# Altium PCB DXv2.pcbdoc (part 1 of 3)
Units mil, origin at the board's own origin, x right, y up, seen from the top; angles counter-clockwise.
Board outline 12846.15 x 9153.85 mil, 2 copper layers (TopLayer, BottomLayer); 114 components, 102 nets, 394 pads, 175 vias.
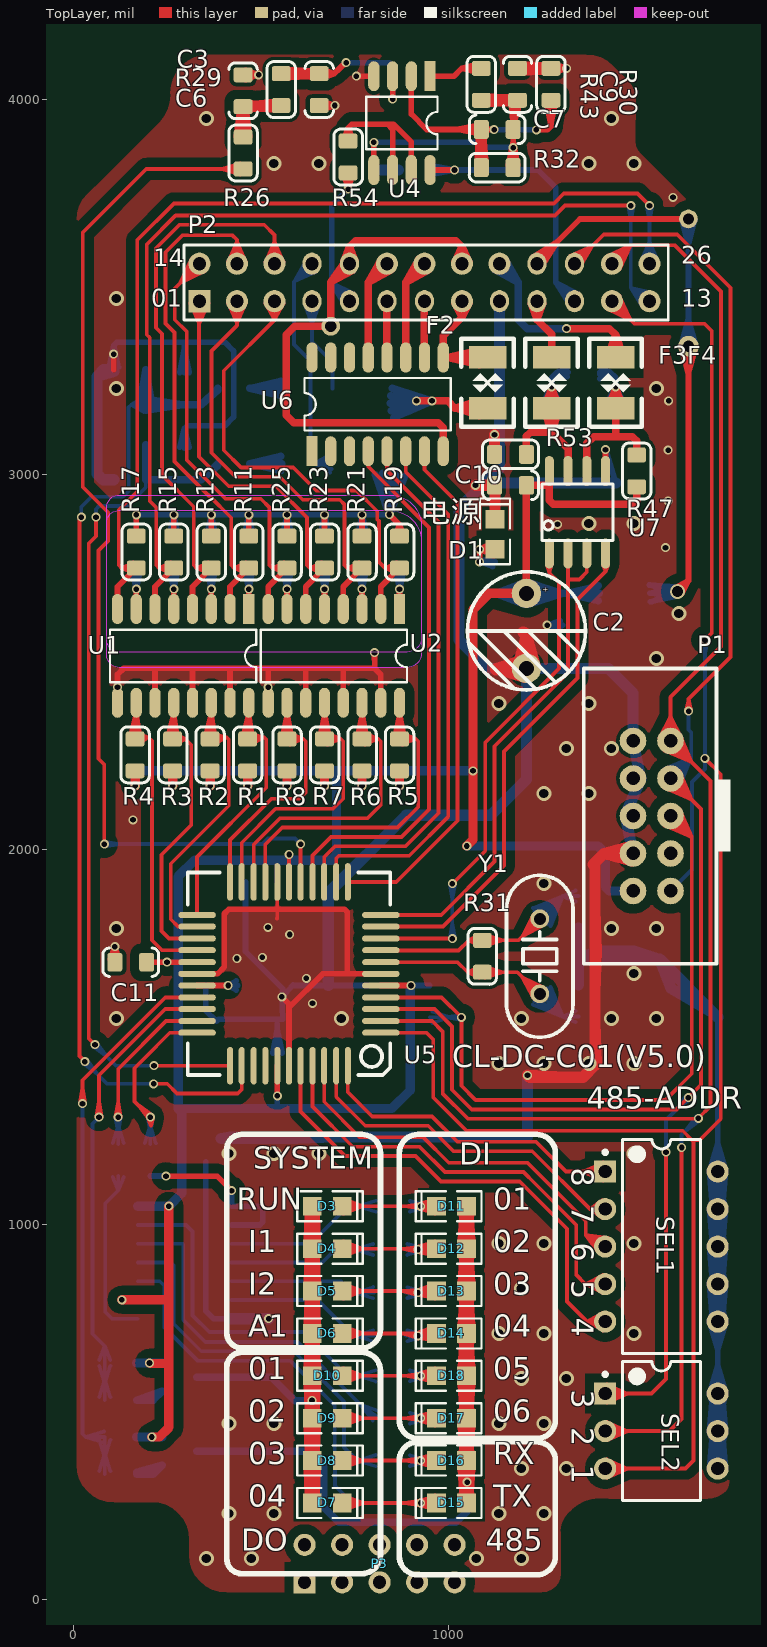
[diagram p0: TopLayer view]
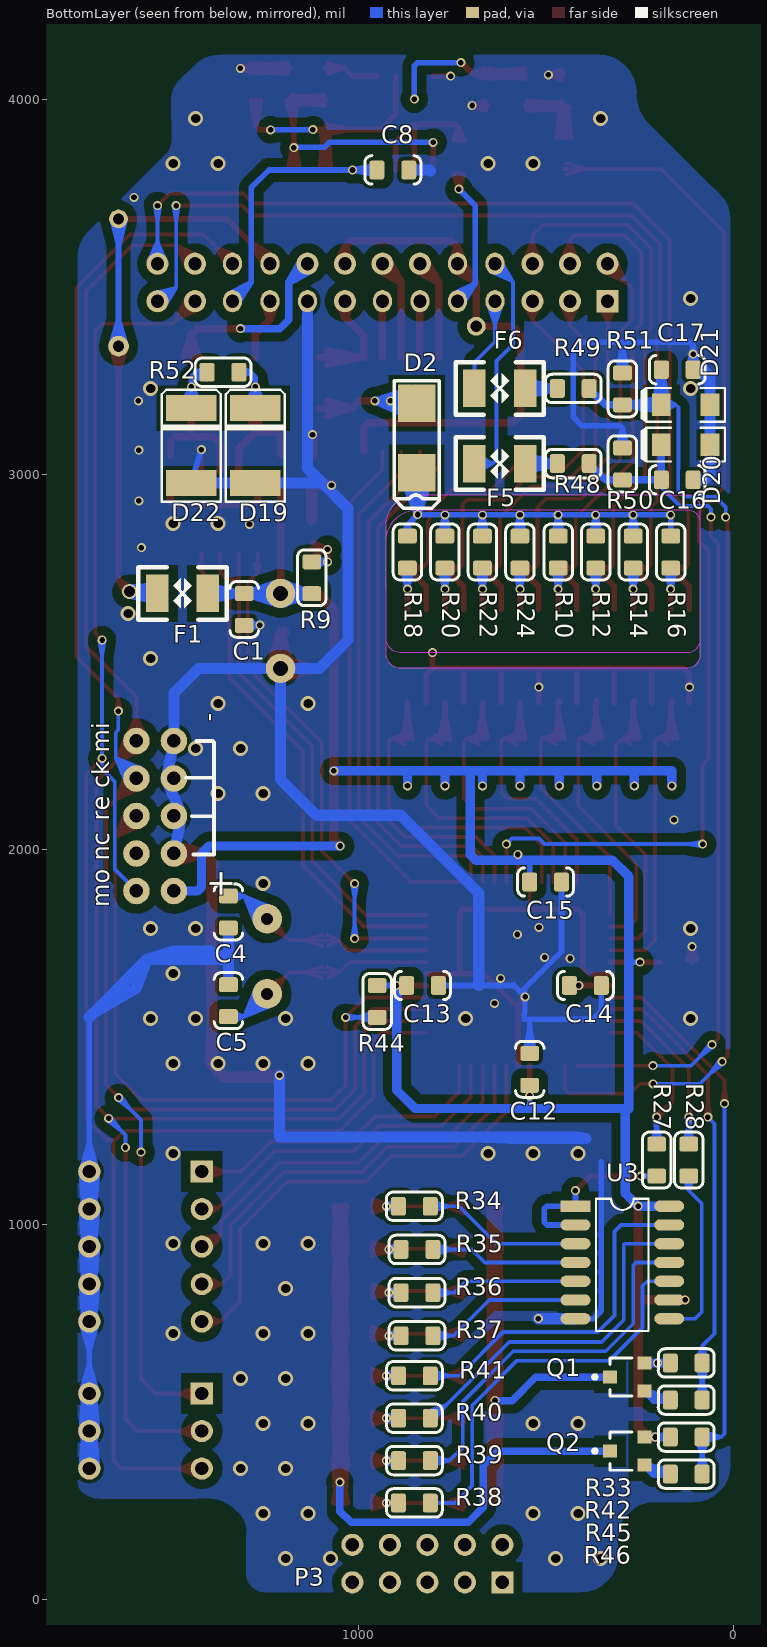
[diagram p1: BottomLayer view, seen from below]
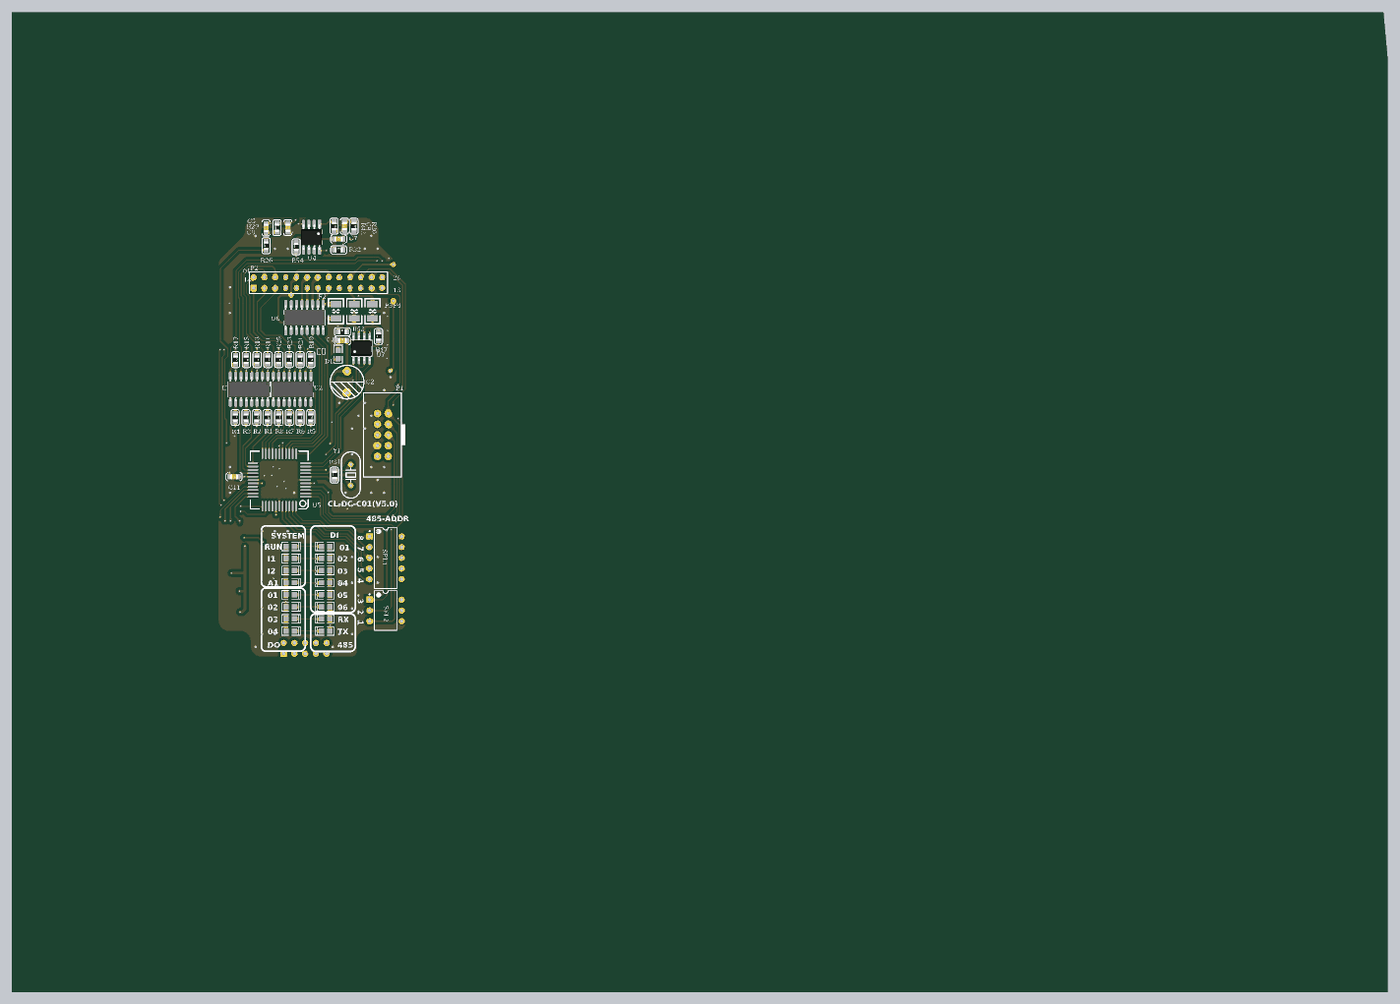
[diagram p4: 3D render of the assembled board from above, using the file's embedded part models]
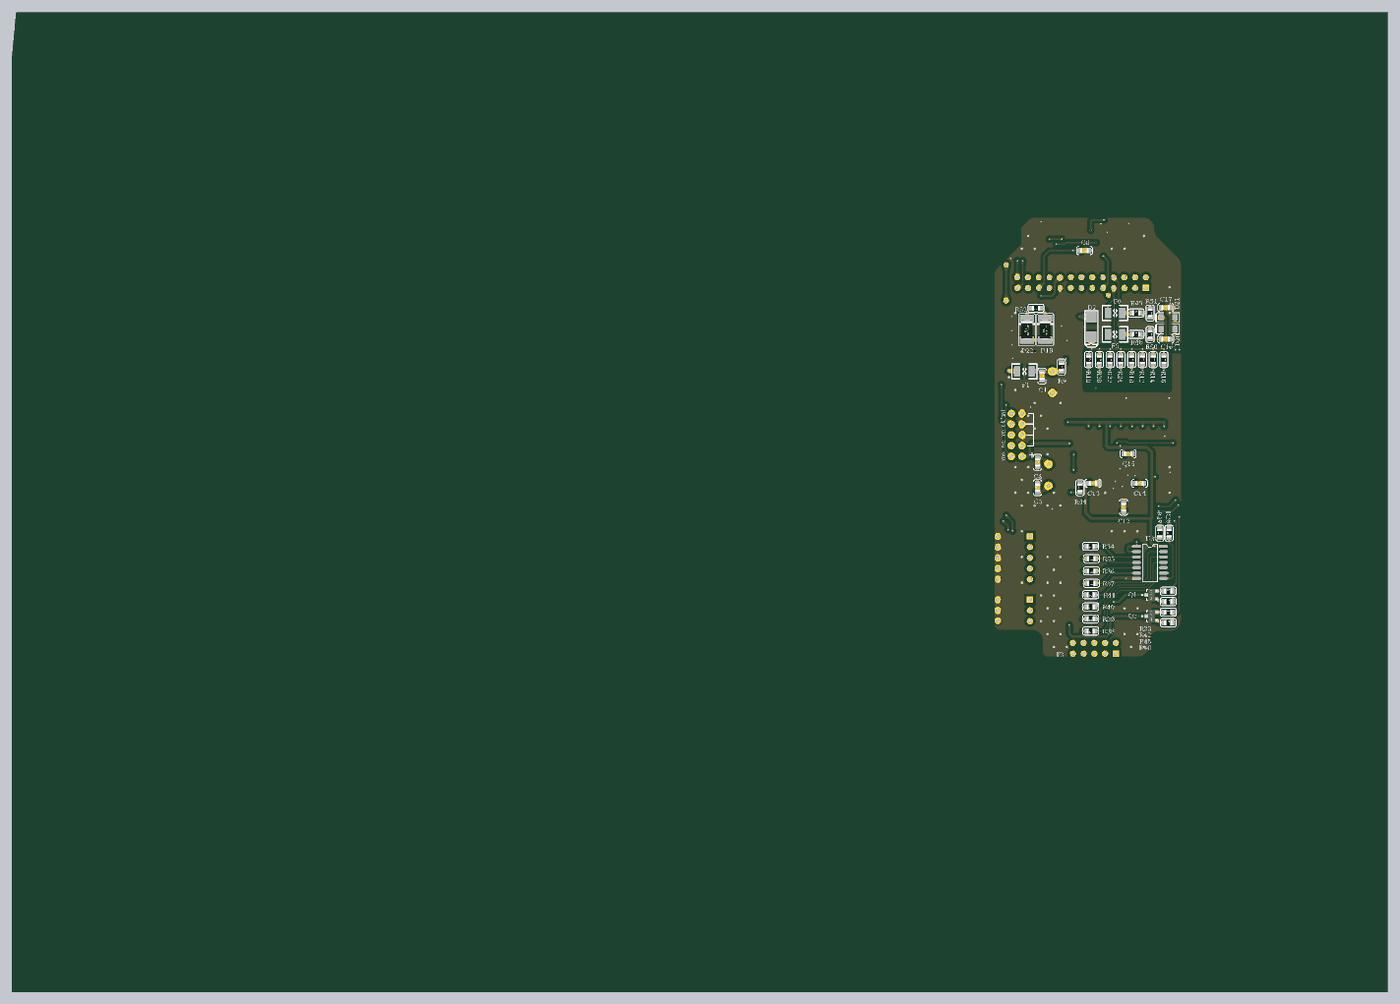
[diagram p5: 3D render of the assembled board from below, using the file's embedded part models]

## Layer stack, top to bottom
TopSolder: solder mask 0.4, Solder Resist, Dk 3.5
TopLayer: signal copper 1.4
Dielectric1: dielectric 12.6, FR-4, Dk 4.8
BottomLayer: signal copper 1.4
BottomSolder: solder mask 0.4, Solder Resist, Dk 3.5

## Board outline
10887.38,6038.25 -1920.31,6038.25 -1920.31,-3115.59 10925.84,-3115.59 10925.84,5615.18

## Design rules (kind name [scope] priority, off if disabled: settings)
Clearance Clearance_2 [All] p1: gap=10
Clearance Clearance_1 [All] p2 off: gap=25
Clearance [All] p3 off: gap=15
ComponentClearance [All] p1 off: gap=10 collisioncheckmode=3 verticalgap=10 showdistances=FALSE
FabricationTestPointUsage TestPointUsage [All] p1: valid=0 allowmultiple=FALSE
FabricationTestpoint Testpoint [(IsPad And (OnTopLayer Or OnBottomLayer))] p1: side=3 testpointundercomponent=TRUE minsize=40 maxsize=100 preferedsize=60 minholesize=20 maxholesize=40 preferedholesize=32 testpointgrid=1 allowsidetop=TRUE allowsidebottom=TRUE usegrid=TRUE gridtolerance=0.01
PolygonConnect PolygonConnect_1 [All vs (InPadClass('All Pads'))] p1: connectstyle=NoConnect reliefconductorwidth=10 reliefentries=4 polygonreliefangle="90 Angle" airgapwidth=10
PolygonConnect [All] p2: connectstyle=Direct reliefconductorwidth=10 reliefentries=4 polygonreliefangle="90 Angle" airgapwidth=10
RoomDefinition mcu [InComponentClass('mcu')] p1: confinementstyle=ConfineIn formatcopy=TRUE lockcomponents=FALSE outline 5156.84,-2909.76 6112.67,-2909.76 6112.67,-1909.28 5156.84,-1909.28
RoutingVias [All] p1: holewidth=15 width=24 viastyle="Through Hole" minholewidth=15 minwidth=24 maxholewidth=15 maxwidth=24
SilkToSolderMaskClearance SilkscreenOverComponentPads [IsPad] p1: minsilkscreentomaskgap=10 clearancetoexposedcopper=TRUE
SolderMaskExpansion [All] p1: expansion=4
Width [All] p1: maxlimit=300 minlimit=8 preferedwidth=30 minimp=50.000000 maximp=50.000000 favimp=50.000000
25 further rules are at their usual default settings.

## Components (designator, comment, footprint, x,y, rotation, side; value= is the part's Value field where it differs from the comment)
C1 "103" C0805 1306.09,2641.11 r270 bottom
C2 "470uf" E8MM 1209.15,2583.61 r270 top locked
C3 "105" c0805 453.5,4024 r90 top
C4 "15P" C0805 1348.07,1834.17 r270 bottom
C5 "15P" C0805 1348.07,1597.69 r90 bottom
C6 "105" c0805 656.5,4027.15 r270 top
C7 "0.1uf" C0805 1131.17,3920.86 r0 top
C8 "0.1uf" C0805 909.68,3812.76 r0 bottom
C9 "105" c0805 1185.21,4041.19 r90 top
C10 "104" C0805 1166.65,2971.83 r0 top
C11 "104" C0805 153.96,1700.18 r180 top
C12 "104" C0805 544.85,1414.53 r90 bottom
C13 "104" C0805 830.49,1638.18 r180 bottom
C14 "104" C0805 396.21,1638.18 r180 bottom
C15 "104" C0805 502.35,1914.18 r180 bottom
C16 "0.1uf" C0805 151.23,2986.57 r180 bottom
C17 "0.1uf" C0805 151.23,3280.18 r180 bottom
D1 "LED" LED0805 1125.59,2801.45 r270 top
D2 "1N4007" M7 845.93,3191 r270 bottom
D3 "LED" LED0805 637.94,1049.38 r180 top
D4 "LED" LED0805 637.94,936.35 r180 top
D5 "LED" LED0805 637.94,823.32 r180 top
D6 "LED" LED0805 637.94,710.29 r180 top
D7 "LED" LED0805 637.94,258.19 r180 top
D8 "LED" LED0805 637.94,371.21 r180 top
D9 "LED" LED0805 637.94,484.24 r180 top
D10 "LED" LED0805 637.94,597.27 r180 top
D11 "LED" LED0805 1049.2,1049.38 r0 top
D12 "LED" LED0805 1049.2,936.35 r0 top
D13 "LED" LED0805 1049.2,823.32 r0 top
D14 "LED" LED0805 1049.2,710.29 r0 top
D15 "LED" LED0805 1049.2,258.19 r0 top
D16 "LED" LED0805 1049.2,371.21 r0 top
D17 "LED" LED0805 1049.2,484.24 r0 top
D18 "LED" LED0805 1049.2,597.27 r0 top
D19 "SMBJ6.8" SMBJ_SMT 1276.41,3077.75 r90 bottom
D20 "6.3V" 1206AK 128.73,3080.07 r0 bottom
D21 "6.3V" 1206AK 128.73,3186.67 r0 bottom
D22 "SMBJ6.8" SMBJ_SMT 1447.12,3077.75 r90 bottom
F1 "1812 2A" F1210 1470.53,2683.61 r180 bottom
F2 "1812 2A" F1210 1105.69,3245.25 r270 top
F3 "X14" F1210 1276.41,3245.25 r270 top
F4 "X14" F1210 1447.12,3245.25 r270 top
F5 "X14" F1210 624.39,3030 r0 bottom
F6 "X14" F1210 624.39,3230.11 r0 bottom
P1 "JTAG" FC10 1543.33,2090.15 r270 top
P2 "Header 13X2A" HDR2X13_CEN 337.25,3462.84 r0 top
P3 "Header 13X2A" HDR2X5_CEN 617.53,46.57 r0 top (schematic designator P2)
Q1 "PNP" SOT23 284.3,594.07 r90 bottom
Q2 "PNP" SOT23 284.3,396.69 r90 bottom
R1 "10K" 0805R 465.52,2253.09 r270 top
R2 "10K" 0805R 365.52,2253.09 r270 top
R3 "10K" 0805R 265.52,2253.09 r270 top
R4 "10K" 0805R 165.52,2253.09 r270 top
R5 "10K" 0805R 870.69,2253.09 r270 top
R6 "10K" 0805R 770.69,2253.09 r270 top
R7 "10K" 0805R 670.69,2253.09 r270 top
R8 "10K" 0805R 570.69,2253.09 r270 top
R9 "3K" 0805R 1125.59,2725.27 r270 bottom
R10 "10K" 0805R 468.74,2793.91 r270 bottom
R11 "10K" 0805R 468.74,2793.91 r270 top
R12 "10K" 0805R 368.74,2793.91 r270 bottom
R13 "10K" 0805R 368.74,2793.91 r270 top
R14 "10K" 0805R 268.74,2793.91 r270 bottom
R15 "10K" 0805R 268.75,2793.91 r270 top
R16 "10K" 0805R 168.75,2793.91 r270 bottom
R17 "10K" 0805R 168.75,2793.91 r270 top
R18 "10K" 0805R 870.69,2793.91 r270 bottom
R19 "10K" 0805R 870.69,2793.91 r270 top
R20 "10K" 0805R 770.69,2793.91 r270 bottom
R21 "10K" 0805R 770.69,2793.91 r270 top
R22 "10K" 0805R 670.69,2793.91 r270 bottom
R23 "10K" 0805R 670.69,2793.91 r270 top
R24 "10K" 0805R 570.69,2793.91 r270 bottom
R25 "10K" 0805R 570.69,2793.91 r270 top
R26 "100K" 0805R 453.5,3858 r90 top
R27 "220" 0805R 206.21,1172.54 r90 bottom
R28 "220" 0805R 120.5,1172.54 r90 bottom
R29 "100K" 0805R 555,4027.15 r90 top
R30 "10K" 0805R 1274.54,4041.19 r270 top
R31 "1M" 0805R 1091.49,1715.98 r90 top
R32 "10K" 0805R 1131.17,3819.14 r0 top
R33 "10K" 0805R 127.35,631.47 r180 bottom
R34 "3K" 0805R 852.36,1049.38 r0 bottom
R35 "3K" 0805R 845.34,934.25 r0 bottom
R36 "3K" 0805R 845.34,819.13 r0 bottom
R37 "3K" 0805R 845.34,704 r0 bottom
R38 "3K" 0805R 852.26,258.19 r0 bottom
R39 "3K" 0805R 852.26,371.21 r0 bottom
R40 "3K" 0805R 852.26,484.24 r0 bottom
R41 "3K" 0805R 852.26,597.27 r0 bottom
R42 "3K" 0805R 127.35,532.78 r180 bottom
R43 "100" 0805R 1088.67,4041.19 r270 top
R44 "10K" 0805R 951.49,1595.68 r90 bottom
R45 "10K" 0805R 127.35,434.09 r180 bottom
R46 "3K" 0805R 127.35,335.4 r180 bottom
R47 "3K" 0805R 1503.03,3010.45 r90 top
R48 "10K" 0805R 428.43,3030 r180 bottom
R49 "10K" 0805R 428.43,3230.11 r180 bottom
R50 "10K" 0805R 297.24,3029.07 r270 bottom
R51 "10K" 0805R 297.24,3229.17 r270 bottom
R52 "10K?" 0805R 1362.69,3273.39 r0 bottom
R53 "3K" 0805R 1166.65,3054.4 r0 top
R54 "100" 0805R 733.6,3847.36 r90 top
SEL1 "SEL" N10A 1569,942 r0 top
SEL2 "SEL" DIP-6 1569,450 r0 top
U1 "PS2512-4" SO_16 293.75,2516.99 r180 top
U2 "PS2512-4" SO_16 695.69,2516.99 r180 top
U3 "164" SO_14 297.64,899.61 r270 bottom
U4 "LM358" SO_08 877.18,3937.76 r180 top
U5 "ATMEGA16A" qfp44 575.85,1669.18 r180 top locked
U6 "2003" SO_16 812.25,3187.75 r0 top locked
U7 "U485" SOP8 1345.06,2900.06 r0 top
Y1 "8MHZ" XAL2 1244.7,1815.93 r270 top

## Footprints (in the part's own frame and the unit in brackets; to place one, negate y for a bottom-side part, rotate by r counter-clockwise, add the part's x,y. Pads: shape width x height; smd on the part's side, far side on the other; paste and mask are expansions set on the pad)
0805R [mil]
  rrect30% 40x50 smd: 1(-42.5,0) 2(42.5,0)
  silkscreen extent -75,-38 75,38, body extent -39,-25 39,25, height 30
1206AK [mil]
  rect 50x60 smd: A(-65,0) K(65,0)
  silkscreen extent -105,-45 118,45
C0805 [mil]
  rrect30% 40x50 smd: 1(-42.5,0) 2(42.5,0)
  silkscreen extent -75,-38 75,38, body extent -39,-25 39,25, height 30
c0805 [mil]
  rrect30% 40x50 smd: 1(-42.5,0) 2(42.5,0)
  silkscreen extent -75,-38 75,38, body extent -39,-25 39,25, height 30
DIP-6 [mm] "DIP; 6 Leads; Row Spacing 7.62 mm; Pitch 2.54 mm"
  rect 1.5x1.5 hole 0.9: 1(-3.81,2.54)
  round 1.5 hole 0.9: 2(-3.81,0) 3(-3.81,-2.54) 4(3.81,-2.54) 5(3.81,0) 6(3.81,2.54)
  silkscreen extent -3.93,-4.7 2.65,4.7, body extent -3.55,-4.7 3.55,4.7, height 5.46
E8MM [mm]
  round 2 hole 1: 1(-2.54,0) 2(2.54,0)
  silkscreen extent -4,-4 4,4, body extent -4.01,-4.04 4.01,3.99, height 7
F1210 [mil]
  rect 60x100 smd: 1(-67.5,0) 2(67.5,0)
  silkscreen extent -118,-70 118,70
FC10 [mm]
  round 1.8 hole 0.914: 1(5.08,1.27) 2(5.08,-1.27) 3(2.54,1.27) 4(2.54,-1.27) 5(0,1.27) 6(0,-1.27) 7(-2.54,1.27) 8(-2.54,-1.27) 9(-5.08,1.27) 10(-5.08,-1.27)
  silkscreen extent -10,-4.61 10,5.32
HDR2X5_CEN [mm] "Connector; Header; 5x2 Position"
  rect 1.5x1.5 hole 0.9: 1(0,0)
  round 1.5 hole 0.9: 2(2.54,0) 3(5.08,0) 4(7.62,0) 5(10.16,0) 6(0,2.54) 7(2.54,2.54) 8(5.08,2.54) 9(7.62,2.54) 10(10.16,2.54)
HDR2X13_CEN [mm] "Connector; Header; 13x2 Position"
  rect 1.5x1.5 hole 0.9: 1(0,0)
  round 1.5 hole 0.9: 2(2.54,0) 3(5.08,0) 8(17.78,0) 12(27.94,0) 13(30.48,0) 14(0,2.54) 15(2.54,2.54) 16(5.08,2.54) 19(12.7,2.54) 20(15.24,2.54) 21(17.78,2.54) 22(20.32,2.54) 25(27.94,2.54) 26(30.48,2.54)
  oval 1.27x1.5 hole 0.9: 4(7.62,0) 5(10.16,0) 6(12.7,0) 7(15.24,0) 9(20.32,0) 10(22.86,0) 11(25.4,0) 17(7.62,2.54) 18(10.16,2.54) 23(22.86,2.54) 24(25.4,2.54)
  silkscreen extent -1.06,-1.27 31.75,3.81
LED0805 [mil]
  rect 50x50 smd: 1(0,0) 2(-80,0)
  silkscreen extent -135,-40 40,40
M7 [mil]
  rect 100x100 smd: 1(0,0) 2(185,0)
  silkscreen extent -60,-60 280,60
N10A [mm] "DIP; 10 Leads; Row Spacing 7.62 mm; Pitch 2.54 mm"
  rect 1.5x1.5 hole 0.9: 1(-3.81,5.08)
  round 1.5 hole 0.9: 2(-3.81,2.54) 3(-3.81,0) 4(-3.81,-2.54) 5(-3.81,-5.08) 6(3.81,-5.08) 7(3.81,-2.54) 8(3.81,0) 9(3.81,2.54) 10(3.81,5.08)
  silkscreen extent -3.93,-7.25 2.65,7.25, body extent -3.25,-7.25 3.25,7.25, height 5.08
qfp44 [mil]
  oval 100x16 smd: 1(-245,157) 2(-245,126) 3(-245,94) 4(-245,63) 5(-245,31) 6(-245,0) 7(-245,-31) 8(-245,-63) 9(-245,-94) 10(-245,-126) 11(-245,-157) 23(245,-157) 24(245,-126) 25(245,-94) 26(245,-63) 27(245,-31) 28(245,0) 29(245,31) 30(245,63) 31(245,94) 32(245,126) 33(245,157)
  oval 16x100 smd: 12(-157,-245) 13(-126,-245) 14(-94,-245) 15(-63,-245) 16(-31,-245) 17(0,-245) 18(31,-245) 19(63,-245) 20(94,-245) 21(126,-245) 22(157,-245) 34(157,245) 35(126,245) 36(94,245) 37(63,245) 38(31,245) 39(0,245) 40(-31,245) 41(-63,245) 42(-94,245) 43(-126,245) 44(-157,245)
  silkscreen extent -270,-270 270,270
SMBJ_SMT [mil]
  rect 70x133.86 smd: A(-100,0) K(100,0)
  silkscreen extent -150,-79 149,79, body extent -91,-53 91,53, height 94
SO_08 [mil]
  rect 30x80 smd: 1(-75,-125)
  oval 30x80 smd: 2(-25,-125) 3(25,-125) 4(75,-125) 5(75,125) 6(25,125) 7(-25,125) 8(-75,125)
  silkscreen extent -95,-70 95,70, body extent -96,-118 96,118, height 61
SO_14 [mil]
  rect 30x80 smd: 1(-150,-125)
  oval 30x80 smd: 2(-100,-125) 3(-50,-125) 4(0,-125) 5(50,-125) 6(100,-125) 7(150,-125) 8(150,125) 9(100,125) 10(50,125) 11(0,125) 12(-50,125) 13(-100,125) 14(-150,125)
  silkscreen extent -170,-70 182,70
SO_16 [mil]
  rect 30x80 smd: 1(-175,-125)
  oval 30x80 smd: 2(-125,-125) 3(-75,-125) 4(-25,-125) 5(25,-125) 6(75,-125) 7(125,-125) 8(175,-125) 9(175,125) 10(125,125) 11(75,125) 12(25,125) 13(-25,125) 14(-75,125) 15(-125,125) 16(-175,125)
  silkscreen extent -195,-70 195,70, body extent -194,-115 192,113, height 69
SOP8 [mil]
  oval 24x80 smd: 1(-75,-110) 2(-25,-110) 3(25,-110) 4(75,-110) 5(75,110) 6(25,110) 7(-25,110) 8(-75,110)
  silkscreen extent -95,-75 95,75, body extent -97,-118 96,118, height 61
SOT23 [mm]
  rect 0.9x0.95 smd: 1(0,1.175) 2(-0.95,-1.175) 3(0.95,-1.175)
  silkscreen extent -1.3,-0.3 1.3,2.33, body extent -1.45,-1.4 1.45,1.4, height 1.2
XAL2 [mil]
  round 50 / inner round 50 / far side round 78.74 hole 32: 1(0,0) 2(200,0)
  silkscreen extent -116,-89 316,89, body extent -123,-94 323,89, height 138

## Part data
C1 C3 C6 C7 C8 C9 C10 C11 C12 C13 C14 C15 C16 C17: library part CAP, "Capacitor"
C2: library part ELECTRO1, "Electrolytic Capacitor"
C4 C5: library part "CAP NP"
D2 D19 D20 D21 D22: library part DIODE, "Diode"
F1 F2 F3 F4 F5 F6: library part "Fuse 1", "Fuse"
P1: library part CON10, "Connector"
P2 P3: "Header, 13-Pin, Dual row"
Q1 Q2: "PNP Bipolar Transistor"
R1 R2 R3 R4 R5 R6 R7 R8 R9 R10 R11 R12 R13 R14 R15 R16 R17 R18 R19 R20 R21 R22 R23 R24 R25 R26 R27 R28 R29 R30 R32 R33 R34 R35 R36 R37 R38 R39 R40 R41 R42 R43 R45 R46 R47 R48 R49 R50 R51 R52 R53 R54: library part RES2
R31 R44: library part res
SEL1: library part "SW DIP-5", "DIP Switch, 5 Position, SPST"
SEL2: library part "SW DIP-3", "DIP Switch, 3 Position, SPST"
U6: library part ULN2003A, "High-Voltage, High-Current Darlington Array"
Y1: library part CRYSTAL

## Free pads (board coordinates)
  round 50 hole 30: 0(687.26,3396) 0(1641.12,3682.22)
  round 55 hole 30: 0(1641.12,3342.92)
  round 40 hole 30: 1(1612.11,2688.52)

## Via types
v1: diameter 24, hole 15, TopLayer to BottomLayer, tented both sides, 115 vias
v2: diameter 40, hole 25, TopLayer to BottomLayer, tented both sides, 60 vias

## Nets (pads, with @x,y where several pads share a name; then routed paths per layer and width w, separated by ;. In a path a pad name is that pad's centre, name@x,y a point inside that pad or via, vN(x,y) a via of type N, cw(c..) or ccw(c..) an arc to the next point about the centre after c; other vN are vias at no path point)
5V_RL_C01: U5.15 U6.4 | length 1454.5
  TopLayer w10: U5.15@638.85,1914.18 638.85,1984.95 688.08,2034.18 875.95,2034.18 949.48,2107.7 949.48,2859.59 787.25,3021.81 U6.4@787.25,3062.75
5V_RL_C02: U5.14 U6.5 | length 1441.6
  TopLayer w10: U5.14@669.85,1914.18 669.85,1980.59 698.43,2009.18 886.31,2009.18 974.48,2097.35 974.48,2874.21 837.25,3011.43 U6.5@837.25,3062.75
5V_RL_C03: U5.13 U6.6 | length 1429.1
  TopLayer w10: U5.13@701.85,1914.18 701.85,1977.24 708.79,1984.18 896.66,1984.18 1000.28,2087.79 1000.28,2894.74 887.25,3007.76 U6.6@887.25,3062.75
5V_RL_C04: U5.12 U6.7 | length 1381.8
  TopLayer w10: U5.12@732.85,1914.18 862.02,1914.18 1025.28,2077.44 1025.28,2925.35 937.25,3013.37 U6.7@937.25,3062.75
24V: D2.1 F2.2 | length 2188.6
  TopLayer w20: v1(915.9,3197.13) v1(957.37,3197.13) 998.84,3197.13 1018.22,3177.75 ; F2.2@1082.73,3157.97 1018.22,3177.75 ; F2.2@1082.73,3197.53 1018.22,3177.75 ; F2.2@1085.69,3177.75 1018.22,3177.75 ; F2.2@1105.69,3177.75 1018.22,3177.75
  BottomLayer w20: D2.1@852.07,3197.13 v1(957.37,3197.13) ; D2.1@885.46,3193.2 v1(957.37,3197.13) ; D2.1@885.83,3206.02 v1(957.37,3197.13) ; D2.1@886.98,3180.43 v1(957.37,3197.13) ; D2.1@888.1,3218.83 v1(957.37,3197.13) ; D2.1@890.39,3167.78 v1(957.37,3197.13) ; v1(915.9,3197.13) v1@956.06,3197.13 ; v1(915.9,3197.13) 850.98,3230.67 v1@956.06,3197.13 ; v1(915.9,3197.13) v1@956.06,3197.13 ; v1(915.9,3197.13) 855.36,3152.12 v1@956.06,3197.13 ; v1(915.9,3197.13) v1@956.06,3197.13 ; v1(915.9,3197.13) 846.63,3210.98 v1@956.06,3197.13 ; v1(915.9,3197.13) v1@956.06,3197.13 ; v1(915.9,3197.13) 848.85,3171.21 v1@956.06,3197.13 ; v1(915.9,3197.13) v1@956.06,3197.13 ; v1(915.9,3197.13) D2.1@845.93,3191 v1@956.06,3197.13 ; v1(915.9,3197.13) v1(957.37,3197.13) ; v1(915.9,3197.13) v1(957.37,3197.13) ; v1(915.9,3197.13) v1(957.37,3197.13) ; v1(915.9,3197.13) v1(957.37,3197.13) ; v1(915.9,3197.13) v1(957.37,3197.13)
24V_RL_O01: P2.19 U6.13 | length 557.9
  TopLayer w20: U6.13@787.25,3312.75 787.25,3512.84 ; U6.13@787.25,3337.75 787.25,3412.75 ; P2.19@821.67,3574.61 787.25,3512.84 ; P2.19@849.02,3547.26 787.25,3512.84 ; 787.25,3512.84 P2.19@837.25,3562.84 787.25,3512.84
24V_RL_O02: P2.6 U6.12 | length 225.1
  TopLayer w20: U6.12@837.25,3312.75 P2.6@837.25,3462.84 ; U6.12@837.25,3337.75 837.25,3412.75
24V_RL_O03: P2.20 U6.11 | length 557.9
  TopLayer w20: U6.11@887.25,3312.75 887.25,3512.84 ; U6.11@887.25,3337.75 887.25,3412.75 ; P2.20@921.67,3574.61 887.25,3512.84 ; P2.20@949.02,3547.26 887.25,3512.84 ; 887.25,3512.84 P2.20@937.25,3562.84 887.25,3512.84
24V_RL_O04: P2.7 U6.10 | length 225.1
  TopLayer w20: U6.10@937.25,3312.75 P2.7@937.25,3462.84 ; U6.10@937.25,3337.75 937.25,3412.75
24VDI: D2.2 R10.1 R11.1 R12.1 R13.1 R14.1 R15.1 R16.1 R17.1 R18.1 R19.1 R20.1 R21.1 R22.1 R23.1 R24.1 R25.1 | length 5227.9
  TopLayer w15: R13.1@368.74,2836.41 v1(368.74,2893.13) ; R25.1@570.69,2836.41 v1(570.69,2893.12) ; R21.1@770.69,2836.41 v1(770.69,2893.13) ; v1(843.34,2894.07) 870.69,2866.72 ; R19.1@858.45,2838.98 870.69,2866.72 ; R19.1@870.69,2836.41 870.69,2866.72 ; R19.1@882.92,2838.98 870.69,2866.72 ; R17.1@168.75,2836.41 v1(168.75,2893.13) R17.1@168.75,2836.41 ; R15.1@268.75,2836.41 v1(268.75,2893.13) R15.1@268.75,2836.41 ; R11.1@468.74,2836.41 v1(468.74,2893.13) R11.1@468.74,2836.41 ; R23.1@670.69,2836.41 v1(670.69,2893.12) R23.1@670.69,2836.41
  BottomLayer w15: R16.1@168.75,2836.41 v1(168.75,2893.13) v1(268.75,2893.13) ; 211.75,2893.13 v1(268.75,2893.13) ; 311.74,2893.13 v1(368.74,2893.13) ; 325.75,2893.13 v1(268.75,2893.13) ; R12.1@381.17,2837.78 v1(368.74,2893.13) ; 411.74,2893.13 v1(468.74,2893.13) ; 513.69,2893.12 v1(570.69,2893.12) ; 525.74,2893.13 v1(468.74,2893.13) ; R24.1@583.11,2837.78 v1(570.69,2893.12) ; 613.69,2893.13 v1(670.69,2893.12) ; 713.69,2893.13 v1(770.69,2893.13) ; 727.69,2893.13 v1(670.69,2893.12) ; R20.1@783.11,2837.78 v1(770.69,2893.13) ; 786.31,2893.13 v1(843.34,2894.07) 870.69,2865.78 ; R18.1@858.47,2839.07 870.69,2865.78 ; R18.1@870.69,2836.41 870.69,2865.78 ; R18.1@882.9,2839.07 870.69,2865.78 ; v1(268.75,2893.13) R14.1@268.75,2836.41 v1(268.75,2893.13) ; v1(268.75,2893.13) v1(368.74,2893.13) ; v1(268.75,2893.13) 256.32,2837.78 v1(268.75,2893.13) ; v1(268.75,2893.13) 281.17,2837.78 v1(268.75,2893.13) ; v1(368.74,2893.13) v1(468.74,2893.13) ; v1(368.74,2893.13) R12.1@368.74,2836.41 v1(368.74,2893.13) ; v1(368.74,2893.13) 356.32,2837.78 v1(368.74,2893.13) ; v1(468.74,2893.13) R10.1@468.74,2836.41 v1(468.74,2893.13) ; v1(468.74,2893.13) v1(670.69,2893.12) ; v1(468.74,2893.13) 456.32,2837.78 v1(468.74,2893.13) ; v1(468.74,2893.13) 481.17,2837.78 v1(468.74,2893.13) ; R24.1@570.69,2836.41 v1(570.69,2893.12) ; R24.1@570.69,2836.41 v1(570.69,2893.12) ; R24.1@570.69,2836.41 v1(570.69,2893.12) ; R24.1@570.69,2836.41 v1(570.69,2893.12) ; v1(570.69,2893.12) 558.26,2837.78 v1(570.69,2893.12) ; v1(670.69,2893.12) v1(770.69,2893.13) ; v1(670.69,2893.12) R22.1@670.69,2836.41 v1(670.69,2893.12) ; v1(670.69,2893.12) 658.26,2837.78 v1(670.69,2893.12) ; v1(670.69,2893.12) 683.11,2837.78 v1(670.69,2893.12) ; v1(770.69,2893.13) R20.1@770.69,2836.41 v1(770.69,2893.13) ; v1(770.69,2893.13) 843.34,2893.13 870.69,2865.78 ; v1(770.69,2893.13) 758.26,2837.78 v1(770.69,2893.13)
  BottomLayer w20: D2.2@806.43,2999.65 v1@843.34,2895.97 ; D2.2@819.55,2962.8 v1(843.34,2894.07) ; D2.2@825.97,3004.65 v1@843.34,2895.97 ; D2.2@832.25,2965.36 v1(843.34,2894.07) ; D2.2@843.34,3003.4 v1(843.34,2894.07) ; D2.2@844.99,2966.05 v1(843.34,2894.07) ; D2.2@845.93,3006 v1@843.34,2895.97 ; D2.2@857.7,2964.88 v1(843.34,2894.07) ; D2.2@865.8,3003.71 v1@843.34,2895.97 ; D2.2@870.34,2961.84 v1(843.34,2894.07) ; D2.2@885.08,2997.8 v1@843.34,2895.97
CNT-12V: C8.2 P2.11 U4.8 | length 1304.8
  TopLayer w15: U4.8@952.18,3812.76 v1(1017.35,3812.74) ; U4.8@960.35,3812.76 v1(1017.35,3812.74)
  BottomLayer w15: C8.2@952.18,3812.76 v1(1017.35,3812.74) ; C8.2@953.38,3800.31 1017.18,3812.76 C8.2@953.38,3825.2 ; C8.2@960.35,3812.76 v1(1017.35,3812.74) ; C8.2@961.17,3801.83 v1(1017.35,3812.74) ; C8.2@961.18,3823.68 v1(1017.35,3812.74) ; P2.11@1323.9,3456.06 1287.15,3512.94 ; P2.11@1337.25,3462.84 1287.15,3512.94 ; P2.11@1337.25,3467.37 1287.15,3512.94 ; P2.11@1347.26,3481.73 1287.15,3512.94 ; v1(1017.35,3812.74) 1240,3812.74 1287.15,3765.58 1287.15,3512.94
CNT-24V: F2.1 P2.8 U6.9 | length 677
  TopLayer w20: U6.9@987.25,3337.75 987.25,3370.24 ; P2.8@1018.24,3458.37 1037.25,3420.24 ; P2.8@1037.25,3462.84 1037.25,3420.24 ; P2.8@1056.26,3458.37 1037.25,3420.24 ; F2.1@1083.47,3292.87 U6.9@995.69,3312.75 ; F2.1@1083.47,3332.62 U6.9@995.69,3312.75 ; F2.1@1085.69,3312.75 U6.9@995.69,3312.75 ; F2.1@1105.69,3312.75 U6.9@987.25,3312.75 987.25,3370.24 ; 987.25,3370.24 1037.25,3420.24
CNT-485-A+: F4.1 P2.22 | length 768.8
  TopLayer w20: v1(1316.01,3389.63) 1430.53,3389.63 1447.12,3373.04 ; F4.1@1427.4,3316.06 1447.12,3373.04 ; F4.1@1447.12,3312.75 1447.12,3373.04 ; F4.1@1466.84,3316.06 1447.12,3373.04
  BottomLayer w20: P2.22@1125.48,3547.26 1187.25,3512.84 ; P2.22@1137.25,3562.84 1187.25,3512.84 ; P2.22@1152.83,3574.61 1187.25,3512.84 ; v1(1316.01,3389.63) 1211.46,3389.63 1187.25,3413.84 1187.25,3512.84
CNT-485-B-: F3.1 P2.10 | length 300.4
  TopLayer w20: P2.10@1222.47,3455.8 1237.25,3413.63 ; P2.10@1237.25,3458.32 1237.25,3413.63 ; P2.10@1237.25,3462.84 1237.25,3413.63 ; P2.10@1252.04,3455.8 1237.25,3413.63 ; F3.1@1276.41,3312.75 1276.41,3374.47 1237.25,3413.63
CNT-AI01: F5.2 P2.17 | length 1129.9
  BottomLayer w10: P2.17@621.64,3570.82 591.04,3516.63 ; P2.17@629.98,3565.18 591.04,3516.63 ; P2.17@637.25,3558.32 591.04,3516.63 ; P2.17@637.25,3562.84 589.34,3514.93 589.34,3347.46 633.41,3303.39 633.41,3039.69 643.13,3029.97 ; P2.17@643.33,3550.38 591.04,3516.63 ; P2.17@648.09,3541.51 591.04,3516.63 ; F5.2@685.47,3005.84 643.16,3030 ; F5.2@685.47,3054.16 643.16,3030 ; F5.2@689.58,3015.18 643.16,3030 ; F5.2@689.58,3044.82 643.16,3030 ; F5.2@691.89,3030 643.16,3030
CNT-AI02: F6.2 P2.4 | length 530.4
  BottomLayer w10: P2.4@617.59,3454.68 637.25,3403.32 ; P2.4@627.29,3457.41 637.25,3403.32 ; P2.4@637.25,3458.32 637.25,3403.32 ; P2.4@637.25,3462.84 637.25,3354.62 691.89,3299.99 F6.2@691.89,3230.11 ; P2.4@647.21,3457.41 637.25,3403.32 ; P2.4@656.92,3454.68 637.25,3403.32
CNT-AO: P2.5 R54.1 | length 658.8
  TopLayer w15: R54.1@721.23,3803.06 v1(733.6,3761.46) ; R54.1@733.6,3804.86 v1(733.6,3761.46) ; R54.1@745.97,3803.06 v1(733.6,3761.46)
  BottomLayer w15: P2.5@723.85,3456.12 689.75,3510.34 ; v1(733.6,3761.46) 689.75,3717.62 689.75,3510.34 ; P2.5@737.25,3462.84 689.75,3510.34 ; P2.5@737.25,3467.37 689.75,3510.34 ; P2.5@747.11,3481.83 689.75,3510.34
CNT-DI01: P2.15 R11.2 U1.2 | length 1741.3
  TopLayer w10: P2.15@413.25,3567.9 437.25,3622.37 ; P2.15@422.83,3564.62 437.25,3622.37 ; P2.15@437.25,3562.84 437.25,3626.85 425.66,3638.44 291.33,3638.44 246.41,3593.52 246.41,3403.27 270.3,3379.38 270.3,3035.47 361.18,2944.59 362.53,2944.59 421.97,2885.16 421.97,2759.04 429.61,2751.41 ; P2.15@451.67,3564.62 437.25,3622.37 ; R11.2@460.45,2736.77 429.61,2751.41 ; R11.2@460.45,2766.04 429.61,2751.41 ; P2.15@461.25,3567.9 437.25,3622.37 ; R11.2@463.74,2751.41 429.61,2751.41 ; R11.2@468.74,2751.41 429.61,2751.41
  TopLayer w15: U1.2@418.75,2641.99 418.74,2701.41 ; U1.2@418.75,2666.99 418.74,2701.41 ; R11.2@468.74,2751.41 418.74,2701.41
CNT-DI02: P2.16 R13.2 U1.4 | length 1870.8
  TopLayer w10: R13.2@360.45,2736.77 329.61,2751.41 ; R13.2@360.45,2766.04 329.61,2751.41 ; R13.2@363.74,2751.41 329.61,2751.41 ; R13.2@368.74,2751.41 329.61,2751.41 ; P2.16@513.25,3567.9 537.25,3622.37 ; P2.16@522.83,3564.62 537.25,3622.37 ; P2.16@537.25,3562.84 537.25,3639.07 509.84,3666.48 284.02,3666.48 221.41,3603.87 221.41,3392.08 237.34,3376.15 237.34,2999.27 321.97,2914.64 321.97,2759.04 329.61,2751.41 ; P2.16@551.67,3564.62 537.25,3622.37 ; P2.16@561.25,3567.9 537.25,3622.37
  TopLayer w15: U1.4@318.75,2641.99 318.75,2701.41 ; U1.4@318.75,2666.99 318.75,2701.41 ; R13.2@368.74,2751.41 318.75,2701.41
CNT-DI03: P2.13 R15.2 U1.6 | length 3192.5
  TopLayer w10: R15.2@260.45,2736.77 229.61,2751.41 ; R15.2@260.45,2766.04 229.61,2751.41 ; R15.2@263.75,2751.41 229.61,2751.41 ; R15.2@268.75,2751.41 229.61,2751.41 ; v1(1487.36,3717.86) 1311.95,3717.86 1285.57,3691.48 273.66,3691.48 196.41,3614.23 196.41,3373.65 204.38,3365.68 204.38,2930 221.97,2912.41 221.97,2759.04 229.61,2751.41
  TopLayer w15: U1.6@218.74,2641.99 218.75,2701.41 ; U1.6@218.74,2666.99 218.75,2701.41 ; R15.2@268.75,2751.41 218.75,2701.41
  BottomLayer w10: v1@1480.39,3717.27 1487.36,3675.86 v1@1494.34,3717.27 ; v1(1487.36,3717.86) 1487.36,3499.06 ; P2.13@1519.18,3446.26 1487.36,3499.06 ; P2.13@1527.39,3452.17 1487.36,3499.06 ; P2.13@1544.34,3475.52 1487.36,3499.06 ; P2.13@1547.42,3485.16 1487.36,3499.06 ; 1487.36,3499.06 1523.57,3462.84 P2.13@1537.25,3462.84 1487.36,3499.06
CNT-DI04: P2.26 R17.2 U1.8 | length 3111.7
  TopLayer w10: R17.2@160.45,2736.77 129.61,2751.41 ; R17.2@160.45,2766.04 129.61,2751.41 ; R17.2@163.75,2751.41 129.61,2751.41 ; R17.2@168.75,2751.41 129.61,2751.41 ; v1(1537.25,3717.86) 1505.25,3749.86 1308.59,3749.86 1282.23,3723.5 269.14,3723.5 171.41,3625.77 171.41,2955.3 121.97,2905.86 121.97,2759.04 129.61,2751.41
  TopLayer w15: U1.8@118.75,2641.99 118.75,2701.41 ; U1.8@118.75,2666.99 118.75,2701.41 ; R17.2@168.75,2751.41 118.75,2701.41
  BottomLayer w10: P2.26@1513.25,3567.9 1537.25,3622.37 ; P2.26@1522.83,3564.62 1537.25,3622.37 ; v1@1530.28,3717.27 1537.25,3675.86 v1@1544.23,3717.27 ; P2.26@1537.25,3562.84 v1(1537.25,3717.86) ; P2.26@1551.67,3564.62 1537.25,3622.37 ; P2.26@1561.25,3567.9 1537.25,3622.37
CNT-DI05: P2.3 R19.2 U2.2 | length 1647.3
  TopLayer w10: P2.3@513.46,3456.87 537.25,3412.49 ; P2.3@522.88,3460.75 537.25,3412.49 ; P2.3@551.63,3460.75 537.25,3412.49 ; P2.3@561.04,3456.87 537.25,3412.49 ; R19.2@862.39,2736.77 831.55,2751.41 ; R19.2@862.39,2766.04 831.55,2751.41 ; R19.2@865.69,2751.41 831.55,2751.41 ; R19.2@870.69,2751.41 831.55,2751.41 ; 537.25,3412.49 P2.3@537.25,3462.84 537.25,3412.49 ; 537.25,3412.49 402.15,3277.39 402.15,3065.65 448.3,3019.5 587.51,3019.5 648.79,2958.22 755.7,2958.22 811.34,2902.58 811.34,2880.81 815.69,2876.47 815.69,2767.27 831.55,2751.41
  TopLayer w15: U2.2@820.69,2641.99 820.69,2701.41 ; U2.2@820.69,2666.99 820.69,2701.41 ; R19.2@870.69,2751.41 820.69,2701.41
CNT-DI06: P2.2 R21.2 U2.4 | length 1620.4
  TopLayer w10: P2.2@413.25,3457.79 437.25,3403.32 ; P2.2@422.83,3461.07 437.25,3403.32 ; P2.2@451.67,3461.07 437.25,3403.32 ; P2.2@461.25,3457.79 437.25,3403.32 ; R21.2@762.39,2736.77 731.55,2751.41 ; R21.2@762.39,2766.04 731.55,2751.41 ; R21.2@765.69,2751.41 731.55,2751.41 ; R21.2@770.69,2751.41 731.55,2751.41 ; 437.25,3403.32 P2.2@437.25,3462.84 437.25,3398.45 369.19,3330.39 369.19,3058.78 433.47,2994.5 551.19,2994.5 612.47,2933.22 711.37,2933.22 723.91,2920.68 723.91,2759.04 731.55,2751.41
  TopLayer w15: U2.4@720.69,2641.99 720.69,2701.41 ; U2.4@720.69,2666.99 720.69,2701.41 ; R21.2@770.69,2751.41 720.69,2701.41
CNT-DI07: P2.1 R23.2 U2.6 | length 1511.6
  TopLayer w10: P2.1@313.17,3458.21 336.23,3403.3 ; P2.1@322.81,3461.32 336.23,3403.3 ; P2.1@336.23,3462.02 336.23,3048.33 415.06,2969.5 540.83,2969.5 623.91,2886.43 623.91,2759.04 631.55,2751.41 ; P2.1@336.43,3462.02 P2.1@337.25,3462.84 336.23,3403.3 ; P2.1@351.64,3460.82 336.23,3403.3 ; P2.1@361.16,3457.38 336.23,3403.3 ; R23.2@662.39,2736.77 631.55,2751.41 ; R23.2@662.39,2766.04 631.55,2751.41 ; R23.2@665.69,2751.41 631.55,2751.41 ; R23.2@670.69,2751.41 631.55,2751.41
  TopLayer w15: U2.6@620.69,2641.99 620.69,2701.41 ; U2.6@620.69,2666.99 620.69,2701.41 ; R23.2@670.69,2751.41 620.69,2701.41
CNT-DI08: P2.14 R25.2 U2.8 | length 1594.8
  TopLayer w10: P2.14@317.2,3576.97 286.51,3512.1 ; P2.14@325.99,3572.02 286.51,3512.1 ; P2.14@337.25,3562.84 271.41,3497 271.41,3413.63 303.26,3381.78 303.26,3039.22 406.68,2935.8 500.83,2935.8 523.91,2912.73 523.91,2759.04 531.55,2751.41 ; P2.14@346.43,3551.58 286.51,3512.1 ; P2.14@351.38,3542.79 286.51,3512.1 ; R25.2@562.39,2736.77 531.55,2751.41 ; R25.2@562.39,2766.04 531.55,2751.41 ; R25.2@565.69,2751.41 531.55,2751.41 ; R25.2@570.69,2751.41 531.55,2751.41
  TopLayer w15: U2.8@520.69,2641.99 520.69,2701.41 ; U2.8@520.69,2666.99 520.69,2701.41 ; R25.2@570.69,2751.41 520.69,2701.41
CNT-GND24V: P2.18 P2.21 pad.0@687.26,3396 U6.8 | length 1883.7
  TopLayer w20: P2.18@722.51,3570.12 737.25,3608.25 ; P2.18@725.99,3568.22 687.25,3512.84 ; P2.18@737.25,3558.32 687.25,3512.84 ; P2.18@737.25,3567.37 737.25,3608.25 ; P2.18@746.05,3546.17 687.25,3512.84 ; P2.18@752,3570.12 737.25,3608.25 ; U6.8@987.25,3062.75 987.25,3125.73 ; U6.8@987.25,3087.75 987.25,3125.73 ; P2.21@1018.18,3567.04 1037.25,3608.25 ; P2.21@1037.25,3562.84 1037.25,3608.25 ; P2.21@1056.32,3567.04 1037.25,3608.25 ; 687.25,3512.84 pad.0@687.26,3396 591.34,3395.99 568.65,3373.31 568.65,3158.85 588.56,3138.95 974.04,3138.95 987.25,3125.73 ; 687.25,3512.84 P2.18@737.25,3562.84 737.25,3608.25 ; 737.25,3608.25 753.42,3624.41 1021.09,3624.41 1037.25,3608.25
CNT-VCC: F1.1 P2.23 pad.0@1641.12,3342.92 pad.0@1641.12,3682.22 pad.1 | length 3421.8
  TopLayer w15: P2.23@1226.34,3581.05 1292.36,3622.51 ; P2.23@1237.25,3562.84 P2.23@1237.25,3567.4 ; P2.23@1250.94,3556.47 1292.36,3622.51 ; pad.1@1604.72,2698.6 1641.12,2717.53 ; pad.1@1612.11,2688.52 1641.12,2717.53 ; pad.0@1621.31,3340.17 1641.12,3270.42 pad.0@1660.93,3340.17 ; pad.1@1622.19,2681.13 1641.12,2717.53 ; pad.0@1641.12,3342.92 1641.12,2717.53 ; pad.0@1641.12,3682.22 1352.07,3682.22 P2.23@1237.25,3567.4 ; P2.23@1237.25,3567.37 1292.36,3622.51
  BottomLayer w15: F1.1@1536.17,2706.03 pad.1@1609.99,2700.84 ; F1.1@1539.15,2661.14 pad.1@1611.85,2676.02 ; F1.1@1539.96,2706.03 pad.1@1612.11,2688.52 ; F1.1@1541.69,2661.41 pad.1@1607.19,2683.61 ; F1.1@1541.69,2705.81 pad.1@1607.19,2683.61 ; F1.1@1542.9,2661.64 pad.1@1612.11,2688.52 ; F1.1@1543.69,2705.38 pad.1@1611.85,2676.02 ; F1.1@1546.53,2662.78 pad.1@1609.99,2700.84 ; pad.0@1621.31,3345.68 1641.11,3415.42 ; pad.0@1623.75,3680.04 1641.11,3612.22 ; pad.0@1658.48,3680.04 1641.11,3612.22 ; pad.0@1660.93,3345.69 1641.11,3415.42 ; F1.1@1538.03,2683.61 pad.1@1607.19,2683.61 ; F1.1@1538.03,2683.61 pad.1@1611.85,2676.02 ; F1.1@1538.03,2683.61 pad.1@1609.99,2700.84 ; F1.1@1538.03,2683.61 pad.1@1612.11,2688.52 ; F1.1@1546.69,2683.61 pad.1@1611.85,2676.02 ; F1.1@1546.69,2683.61 pad.1@1609.99,2700.84 ; F1.1@1546.69,2683.61 pad.1@1612.11,2688.52 ; 1641.11,3415.42 pad.0@1641.12,3342.92 pad.0@1641.12,3682.22 1641.11,3612.22
COM1: D3.1 D4.1 D5.1 D6.1 D7.1 D8.1 D9.1 D10.1 Q1.1 | length 9359.9
  TopLayer w20: D8.1@622.94,371.69 627.7,285.88 ; D9.1@622.94,484.72 627.7,398.91 ; D10.1@622.94,596.79 627.7,682.6 ; D6.1@622.94,709.82 627.7,795.63 ; D5.1@622.94,822.84 627.7,908.65 ; D4.1@622.94,935.87 627.7,1021.68 ; D7.1@622.99,259.51 637.94,343.19 ; D8.1@622.99,369.89 637.94,286.21 D8.1@652.88,369.89 ; D8.1@622.99,372.54 637.94,456.21 ; D9.1@622.99,482.92 637.94,399.24 D9.1@652.88,482.92 ; D10.1@622.99,598.59 637.94,682.27 D10.1@652.88,598.59 ; D6.1@622.99,708.97 637.94,625.29 ; D6.1@622.99,711.62 637.94,795.29 D6.1@652.88,711.62 ; D5.1@622.99,822 637.94,738.32 ; D5.1@622.99,824.65 637.94,908.32 D5.1@652.88,824.65 ; D4.1@622.99,935.03 637.94,851.35 ; D4.1@622.99,937.67 637.94,1021.35 D4.1@652.88,937.67 ; D3.1@622.99,1048.05 637.94,964.38 ; D8.1@623.25,368.13 648.17,285.88 ; D9.1@623.25,481.16 648.17,398.91 ; D10.1@623.25,600.35 648.17,682.6 ; D6.1@623.25,713.37 648.17,795.63 ; D5.1@623.25,826.4 648.17,908.65 ; D4.1@623.25,939.43 648.17,1021.68 ; D7.1@637.94,258.19 D8.1@637.94,371.21 ; D10.1@637.94,603.5 v1(637.33,531.49) ; D3.1@637.94,1049.38 D4.1@637.94,936.35 ; D8.1@652.62,368.13 627.7,285.88 ; D9.1@652.62,481.16 627.7,398.91 ; D10.1@652.62,600.35 627.7,682.6 ; D6.1@652.62,713.37 627.7,795.63 ; D5.1@652.62,826.4 627.7,908.65 ; D4.1@652.62,939.43 627.7,1021.68 ; D7.1@652.88,259.51 637.94,343.19 ; D8.1@652.88,372.54 637.94,456.21 ; D6.1@652.88,708.97 637.94,625.29 ; D5.1@652.88,822 637.94,738.32 ; D4.1@652.88,935.03 637.94,851.35 ; D3.1@652.88,1048.05 637.94,964.38 ; D8.1@652.93,371.69 648.17,285.88 ; D9.1@652.93,484.72 648.17,398.91 ; D10.1@652.93,596.79 648.17,682.6 ; D6.1@652.93,709.82 648.17,795.63 ; D5.1@652.93,822.84 648.17,908.65 ; D4.1@652.93,935.87 648.17,1021.68 ; 627.7,285.88 D8.1@637.94,371.21 ; 627.7,398.91 D9.1@637.94,484.24 ; 627.7,511.94 652.62,594.19 v1(637.33,531.49) ; 627.7,511.94 622.94,597.75 v1(637.33,531.49) ; 627.7,511.94 D10.1@637.94,597.27 ; 627.7,511.94 v1(637.33,531.49) ; 627.7,511.94 v1(637.33,531.49) ; 627.7,511.94 v1(637.33,531.49) ; 627.7,682.6 D10.1@637.94,597.27 ; 627.7,795.63 D6.1@637.94,710.29 ; 627.7,908.65 D5.1@637.94,823.32 ; 627.7,1021.68 D4.1@637.94,936.35 ; v1(637.33,531.49) 652.93,597.75 648.17,511.94 ; v1(637.33,531.49) 648.17,511.94 ; v1(637.33,531.49) 637.94,569.24 ; v1(637.33,531.49) 622.99,485.56 637.94,569.24 ; v1(637.33,531.49) 652.88,485.56 637.94,569.24 ; v1(637.33,531.49) 637.94,569.24 ; v1(637.33,531.49) D10.1@637.94,597.27 ; v1(637.33,531.49) 648.17,511.94 ; v1(637.33,531.49) 623.25,594.19 648.17,511.94 ; v1(637.33,531.49) 648.17,511.94 ; v1(637.33,531.49) D10.1@637.94,597.27 ; v1(637.33,531.49) 652.88,595.94 637.94,512.27 ; v1(637.33,531.49) 637.94,512.27 ; v1(637.33,531.49) 637.94,512.27 ; v1(637.33,531.49) 622.99,595.94 637.94,512.27 ; v1(637.33,531.49) D9.1@637.94,484.24 ; 637.94,343.19 652.39,367.2 637.94,343.19 ; 637.94,343.19 623.48,367.2 637.94,343.19 ; 637.94,343.19 D8.1@637.94,371.21 ; 637.94,343.19 D8.1@637.94,371.21 ; D8.1@637.94,371.21 D9.1@637.94,484.24 ; D8.1@637.94,371.21 648.17,285.88 ; 637.94,456.21 652.39,480.23 637.94,456.21 ; 637.94,456.21 623.48,480.23 637.94,456.21 ; 637.94,456.21 D9.1@637.94,484.24 ; 637.94,456.21 D9.1@637.94,484.24 ; D9.1@637.94,484.24 D6.1@637.94,710.29 ; D9.1@637.94,484.24 648.17,398.91 ; 637.94,569.24 652.39,593.25 637.94,569.24 ; 637.94,569.24 623.48,593.25 637.94,569.24 ; 637.94,569.24 D10.1@637.94,597.27 ; 637.94,569.24 D10.1@637.94,597.27 ; D10.1@637.94,597.27 648.17,682.6 ; D10.1@637.94,597.27 637.94,625.29 ; D10.1@637.94,597.27 637.94,625.29 ; D10.1@637.94,597.27 648.17,511.94 ; 637.94,625.29 623.48,601.28 637.94,625.29 ; 637.94,625.29 652.39,601.28 637.94,625.29 ; D6.1@637.94,710.29 D5.1@637.94,823.32 ; D6.1@637.94,710.29 648.17,795.63 ; D6.1@637.94,710.29 637.94,738.32 ; D6.1@637.94,710.29 637.94,738.32 ; 637.94,738.32 623.48,714.31 637.94,738.32 ; 637.94,738.32 652.39,714.31 637.94,738.32 ; D5.1@637.94,823.32 D4.1@637.94,936.35 ; D5.1@637.94,823.32 648.17,908.65 ; D5.1@637.94,823.32 637.94,851.35 ; D5.1@637.94,823.32 637.94,851.35 ; 637.94,851.35 623.48,827.34 637.94,851.35 ; 637.94,851.35 652.39,827.34 637.94,851.35 ; D4.1@637.94,936.35 648.17,1021.68 ; D4.1@637.94,936.35 637.94,964.38 ; D4.1@637.94,936.35 637.94,964.38 ; 637.94,964.38 623.48,940.36 637.94,964.38 ; 637.94,964.38 652.39,940.36 637.94,964.38
  BottomLayer w20: Q1.1@330.56,594.07 528.43,594.07 591.45,531.05 636.9,531.05 v1(637.33,531.49) v1@637.76,531.49 ; Q1.1@331.54,594.07 409.26,594.07
COM1-RX: U5.9 U7.1 | length 1633.8
  TopLayer w10: U5.9@820.85,1763.18 v1(1011.54,1763.18) v1@1014.78,1766.42 ; v1@1010.43,1909.48 v1@1010.99,1910.03 ; v1(1011.54,1909.48) 1099.22,1997.16 1099.22,2286.48 1296.2,2483.45 1296.2,2712.57 1270.06,2738.71 ; U7.1@1263.14,2761.01 1270.06,2738.71 ; U7.1@1270.06,2762.06 1270.06,2738.71 ; U7.1@1270.06,2790.06 1270.06,2738.71 ; U7.1@1276.98,2761.01 1270.06,2738.71
  BottomLayer w10: v1@1004.57,1763.76 1011.54,1805.18 v1@1018.52,1763.76 ; v1@1004.57,1908.9 1011.54,1867.48 ; v1@1010.43,1909.48 v1@1011.54,1908.37 ; v1(1011.54,1763.18) v1@1011.54,1910.03 ; v1(1011.54,1909.48) 1011.54,1867.48 ; v1@1018.52,1908.9 1011.54,1867.48
COM1-TX: U5.10 U7.4 | length 1399.7
  TopLayer w10: U5.10@820.85,1795.18 986.57,1795.18 1149.22,1957.83 1149.22,2262.25 1345.06,2458.08 1345.06,2667.19 1420.06,2742.19 ; U7.4@1413.17,2760.82 1420.06,2742.19 ; U7.4@1420.06,2762.06 1420.06,2742.19 ; U7.4@1420.06,2790.06 1420.06,2742.19 ; U7.4@1426.95,2760.82 1420.06,2742.19
COM1-TXEN: U5.11 U7.2 U7.3 | length 1372.5
  TopLayer w10: U5.11@820.85,1826.18 981.69,1826.18 1124.22,1968.71 1124.22,2276.12 1320.06,2471.96 1320.06,2720.86 ; U7.2@1320.06,2790.06 1320.06,2720.86 ; U7.3@1370.06,2790.06 1370.06,2740.67 1350.24,2720.86 1320.06,2720.86